# EAGLE board CMRI-Bus-Interface-L_array (EAGLE 7.7.0)
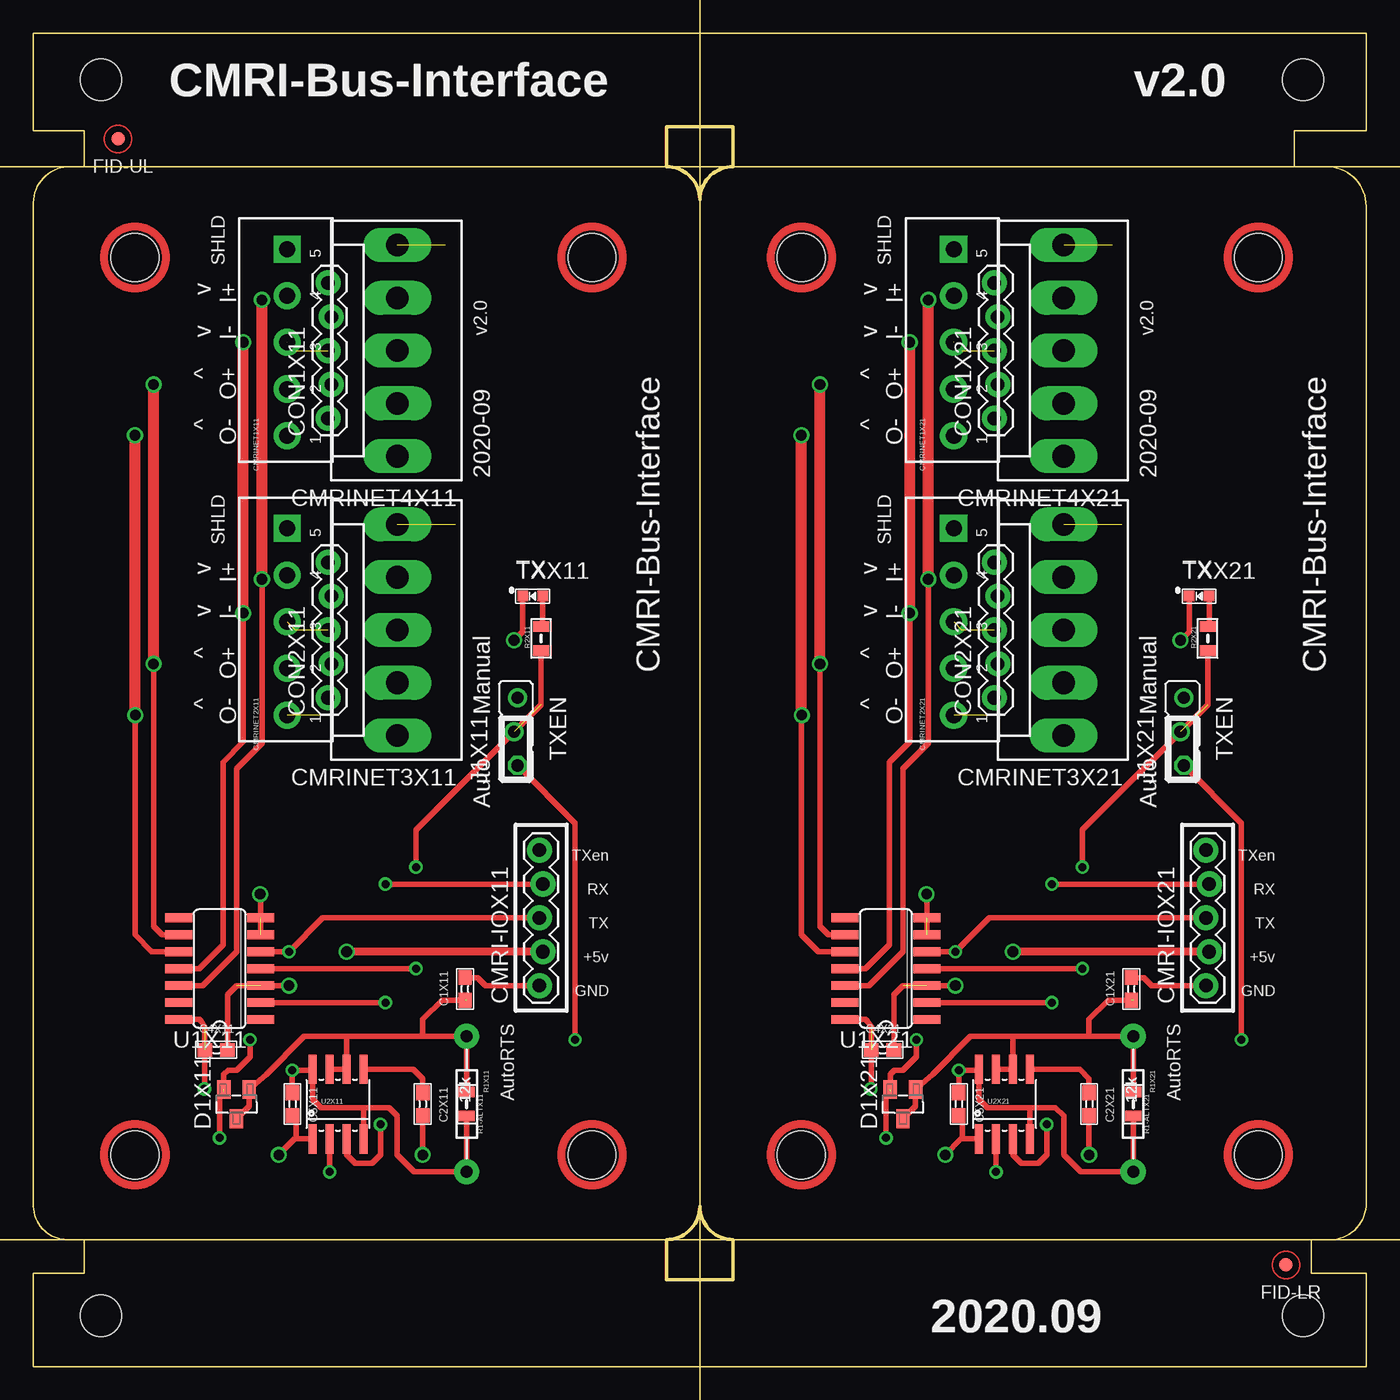
[diagram p0: board, top side]
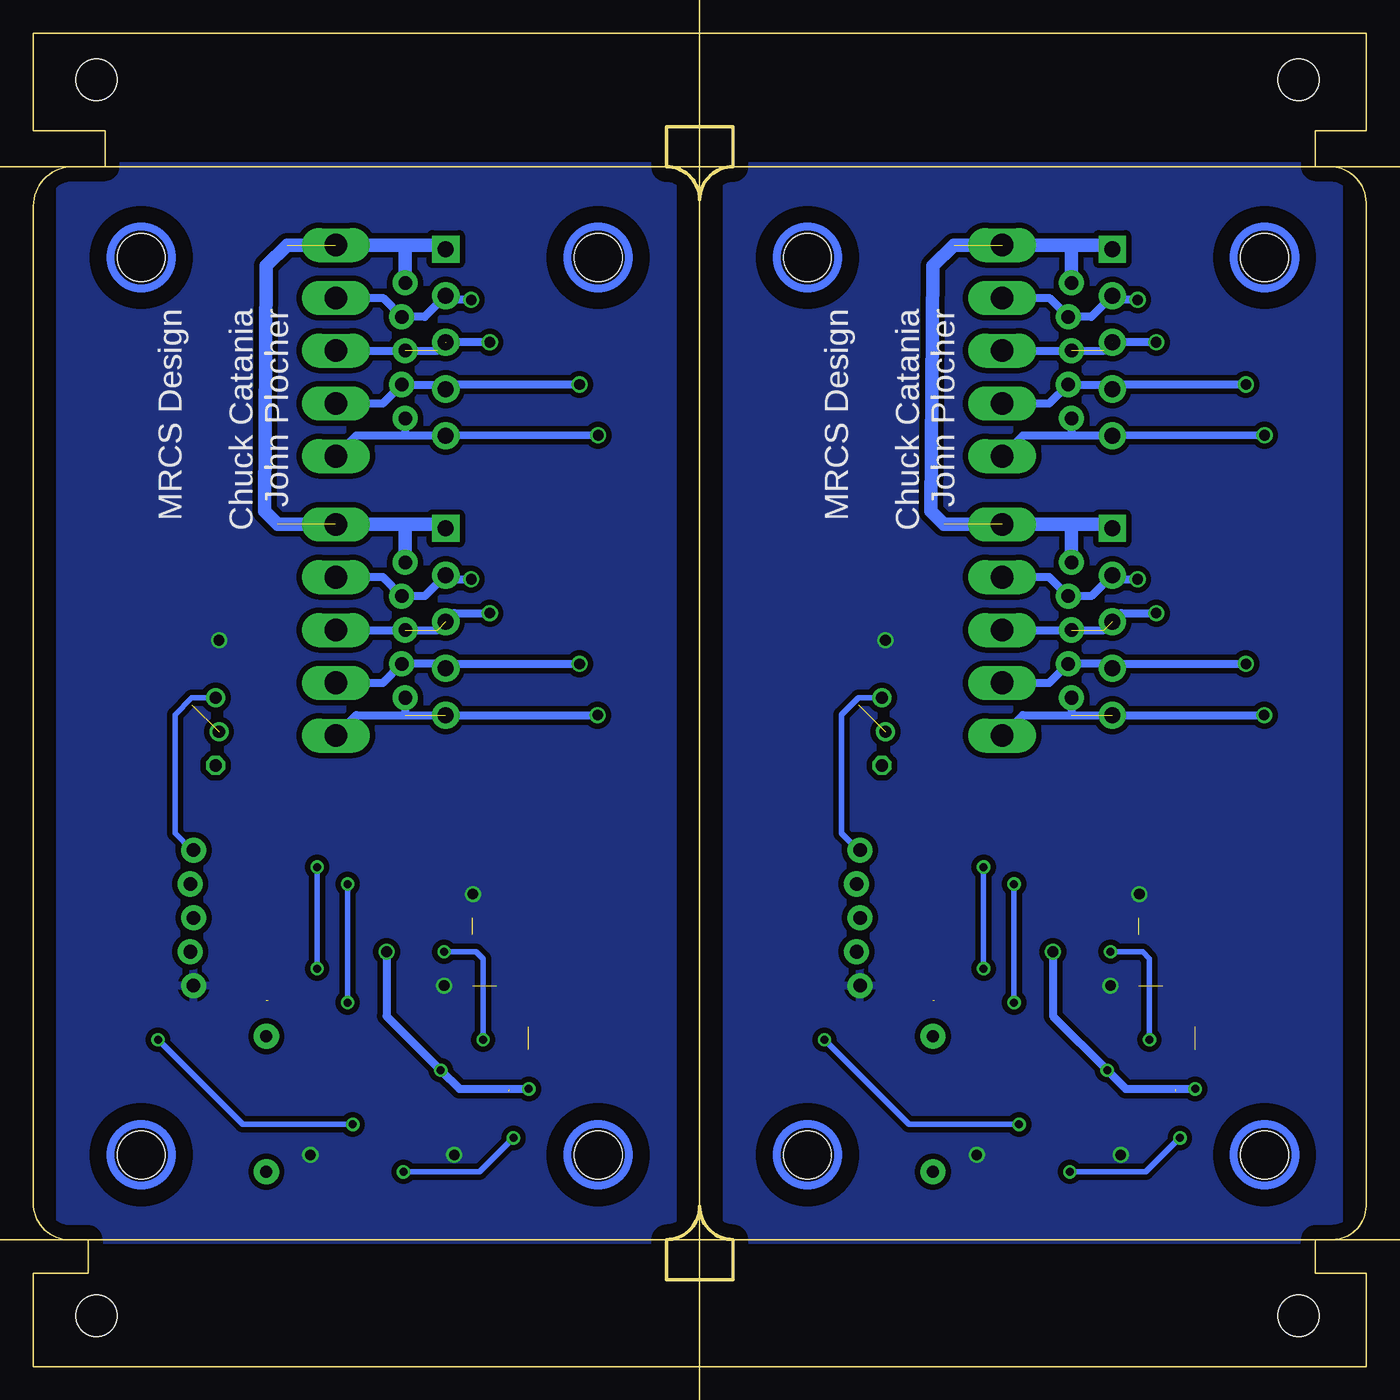
[diagram p1: board, bottom side, seen from below]

Size 100.01 x 100 mm. Coordinates in mm from the lower left corner, seen from the top.
Copper layers (1*16): Top 0.035mm / dielectric 1.5mm / Bottom 0.035mm
Design rules "default": minimum track width 10mil, minimum drill 0.6mm, track to track 8mil, track to pad 8mil, pad to pad 8mil, via to via 8mil, smd to smd 8mil, copper to edge 40mil, drill to drill 8mil, minimum pad ring 10mil, minimum via ring 8mil, stop-mask expansion 4mil, vias tented up to drill 0mil, thermal gap 10mil

## Footprints (pad centres in the part's own frame; a part is rotated, then mirrored left to right if it is on the bottom)
0603-CAP = smd 1.1 x 1: 1 -0.85,0; 2 0.85,0
1X05-CMRI-IO = drill 1.016 pad 1.88: 1 0,0.127; 2 2.54,-0.127; 3 5.08,0.127; 4 7.62,-0.127; 5 10.16,0.127
CMRINET-3.5MM = drill 1.2 pad 2.032: 1 -6.38,0; 2 -2.88,0; 3 0.62,0; 4 4.12,0 | drill 1.2 pad 2.032 square: 5 7.62,0
KK-156-5 = drill 1.7 pad 2.184 long: 1 -7.92,0; 2 -3.96,0; 3 0,0; 4 3.96,0; 5 7.92,0
1X05_LOCK = drill 1.016 pad 1.88: 1 0,0.127; 2 2.54,-0.127; 3 5.08,0.127; 4 7.62,-0.127; 5 10.16,0.127
SOT23 = smd 1.4 x 1: 1 1.1,-0.95; 2 1.1,0.95; 3 -1.1,0
FIDUCIAL_1MM = smd 1 x 1: 1 0,0
J3-254 = drill 0.914 octagon: 1 -2.54,-0.127 | drill 0.914: 2 0,0.127; 3 2.54,-0.127
MOUNTINGHOLE = hole 3.6: 0,0
0805-RES = smd 0.8 x 1.2: 1 -0.9,0; 2 0.9,0
AXIAL-0.4-RES = drill 0.9 pad 1.88: P$1 -5.08,0; P$2 5.08,0
0603-LED = smd 0.8 x 0.8: A 0.75,0; C -0.75,0
SO14 = smd 0.66 x 2.032: 1 -3.81,-3.073; 2 -2.54,-3.073; 3 -1.27,-3.073; 4 0,-3.073; 5 1.27,-3.073; 6 2.54,-3.073; 7 3.81,-3.073; 8 3.81,3.073; 9 2.54,3.073; 10 1.27,3.073; 11 0,3.073; 12 -1.27,3.073; 13 -2.54,3.073; 14 -3.81,3.073
BOARD-10X8X2-TEMPLATE = hole 3.1: 5.08,96.52; 95.25,96.52; 5.08,3.81; 95.25,3.81
SO08 = smd 0.61 x 2.21: 1 -1.905,-2.616; 2 -0.635,-2.616; 3 0.635,-2.616; 4 1.905,-2.616; 5 1.905,2.616; 6 0.635,2.616; 7 -0.635,2.616; 8 -1.905,2.616

## Placement (x,y rotation side)
C1X11  0.1uF  [0603-CAP]  32.39,28.32 90 top
C1X21  0.1uF  [0603-CAP]  82.39,28.32 90 top
C2X11  .01uF  [0603-CAP]  29.22,19.68 270 top
C2X21  .01uF  [0603-CAP]  79.22,19.68 270 top
C4X11  .01uF  [0603-CAP]  13.72,23.75 0 top
C4X21  .01uF  [0603-CAP]  63.72,23.75 0 top
C5X11  .01uF  [0603-CAP]  19.44,19.68 270 top
C5X21  .01uF  [0603-CAP]  69.44,19.68 270 top
CMRI-IOX11  0.100  [1X05-CMRI-IO]  38.11,28.57 90 top
CMRI-IOX21  0.100  [1X05-CMRI-IO]  88.11,28.57 90 top
CMRINET1X11  3.5mm  [CMRINET-3.5MM]  19.06,76.2 90 top
CMRINET1X21  3.5mm  [CMRINET-3.5MM]  69.06,76.2 90 top
CMRINET2X11  3.5mm  [CMRINET-3.5MM]  19.06,55.24 90 top
CMRINET2X21  3.5mm  [CMRINET-3.5MM]  69.06,55.24 90 top
CMRINET3X11  0.156  [KK-156-5]  27.31,55.24 90 top
CMRINET3X21  0.156  [KK-156-5]  77.31,55.24 90 top
CMRINET4X11  0.156  [KK-156-5]  27.31,76.2 90 top
CMRINET4X21  0.156  [KK-156-5]  77.31,76.2 90 top
CON1X11  0.100  [1X05_LOCK]  22.23,71.12 90 top
CON1X21  0.100  [1X05_LOCK]  72.23,71.12 90 top
CON2X11  0.100  [1X05_LOCK]  22.23,50.16 90 top
CON2X21  0.100  [1X05_LOCK]  72.23,50.16 90 top
D1X11  BAV199  [SOT23]  15.25,19.68 90 top
D1X21  BAV199  [SOT23]  65.25,19.68 90 top
FID-LR  FIDUCIAL  [FIDUCIAL_1MM]  93.99,7.62 0 top
FID-UL  FIDUCIAL  [FIDUCIAL_1MM]  6.36,92.08 0 top
J1X11  0.100  [J3-254]  36.2,47.62 90 top
J1X21  0.100  [J3-254]  86.2,47.62 90 top
M1X11  MOUNTINGHOLE  [MOUNTINGHOLE]  7.63,15.88 0 top
M1X21  MOUNTINGHOLE  [MOUNTINGHOLE]  57.63,15.88 0 top
M2X11  MOUNTINGHOLE  [MOUNTINGHOLE]  7.63,83.19 0 top
M2X21  MOUNTINGHOLE  [MOUNTINGHOLE]  57.63,83.19 0 top
M3X11  MOUNTINGHOLE  [MOUNTINGHOLE]  41.92,15.88 0 top
M3X21  MOUNTINGHOLE  [MOUNTINGHOLE]  91.92,15.88 0 top
M4X11  MOUNTINGHOLE  [MOUNTINGHOLE]  41.92,83.19 0 top
M4X21  MOUNTINGHOLE  [MOUNTINGHOLE]  91.92,83.19 0 top
R1-ALTX11  12k  [0805-RES]  32.52,19.68 270 top
R1-ALTX21  12k  [0805-RES]  82.52,19.68 270 top
R1X11  12k  [AXIAL-0.4-RES]  32.52,19.68 270 top
R1X21  12k  [AXIAL-0.4-RES]  82.52,19.68 270 top
R2X11  470  [0805-RES]  38.11,54.61 90 top
R2X21  470  [0805-RES]  88.11,54.61 90 top
TXX11  Y  [0603-LED]  37.47,57.78 0 top
TXX21  Y  [0603-LED]  87.47,57.78 0 top
U1X11  MAX3465CSD  [SO14]  13.98,29.84 90 top
U1X21  MAX3465CSD  [SO14]  63.98,29.84 90 top
U2X1  BOARD  [BOARD-10X8X2-TEMPLATE]  0.01,0 0 top
U2X11  NE555  [SO08]  22.87,19.68 0 top
U2X21  NE555  [SO08]  72.87,19.68 0 top

## Library data of the parts
C1X11 C1X21 C2X11 C2X21 C4X11 C4X21 C5X11 C5X21 CMRI-IOX11 CMRI-IOX21 CMRINET1X11 CMRINET1X21 CMRINET2X11 CMRINET2X21 CMRINET3X11 CMRINET3X21 CMRINET4X11 CMRINET4X21 CON1X11 CON1X21 CON2X11 CON2X21 D1X11 D1X21 FID-LR FID-UL J1X11 J1X21 M1X11 M1X21 M2X11 M2X21 M3X11 M3X21 M4X11 M4X21 R1-ALTX11 R1-ALTX21 R1X11 R1X21 R2X11 R2X21 TXX11 TXX21 U1X11 U1X21 U2X1 U2X11 U2X21 = SPCoast

## Nets
GNDX11: C1X11.2 C2X11.2 C4X11.2 C5X11.2 CMRI-IOX11.1 TXX11.C U1X11.3 U1X11.6 U1X11.7 U2X11.1
GNDX21: C1X21.2 C2X21.2 C4X21.2 C5X21.2 CMRI-IOX21.1 TXX21.C U1X21.3 U1X21.6 U1X21.7 U2X21.1
IN+X11: CMRINET1X11.4 CMRINET2X11.4 CMRINET3X11.4 CMRINET4X11.4 CON1X11.4 CON2X11.4 U1X11.12
IN+X21: CMRINET1X21.4 CMRINET2X21.4 CMRINET3X21.4 CMRINET4X21.4 CON1X21.4 CON2X21.4 U1X21.12
IN-X11: CMRINET1X11.3 CMRINET2X11.3 CMRINET3X11.3 CMRINET4X11.3 CON1X11.3 CON2X11.3 U1X11.11
IN-X21: CMRINET1X21.3 CMRINET2X21.3 CMRINET3X21.3 CMRINET4X21.3 CON1X21.3 CON2X21.3 U1X21.11
N$29X11: R2X11.2 TXX11.A
N$29X21: R2X21.2 TXX21.A
N$38X11: C2X11.1 U2X11.5
N$38X21: C2X21.1 U2X21.5
N$52X11: C1X11.1 D1X11.1 D1X11.3 R1-ALTX11.1 R1X11.P$1 U2X11.6 U2X11.7
N$52X21: C1X21.1 D1X21.1 D1X21.3 R1-ALTX21.1 R1X21.P$1 U2X21.6 U2X21.7
OUT+X11: CMRINET1X11.2 CMRINET2X11.2 CMRINET3X11.2 CMRINET4X11.2 CON1X11.2 CON2X11.2 U1X11.9
OUT+X21: CMRINET1X21.2 CMRINET2X21.2 CMRINET3X21.2 CMRINET4X21.2 CON1X21.2 CON2X21.2 U1X21.9
OUT-X11: CMRINET1X11.1 CMRINET2X11.1 CMRINET3X11.1 CMRINET4X11.1 CON1X11.1 CON2X11.1 U1X11.10
OUT-X21: CMRINET1X21.1 CMRINET2X21.1 CMRINET3X21.1 CMRINET4X21.1 CON1X21.1 CON2X21.1 U1X21.10
RXX11: CMRI-IOX11.4 U1X11.2
RXX21: CMRI-IOX21.4 U1X21.2
SHIELDX11: CMRINET1X11.5 CMRINET2X11.5 CMRINET3X11.5 CMRINET4X11.5 CON1X11.5 CON2X11.5
SHIELDX21: CMRINET1X21.5 CMRINET2X21.5 CMRINET3X21.5 CMRINET4X21.5 CON1X21.5 CON2X21.5
TXEN-AUTOX11: J1X11.1 U2X11.3
TXEN-AUTOX21: J1X21.1 U2X21.3
TXEN-MANUALX11: CMRI-IOX11.5 J1X11.3
TXEN-MANUALX21: CMRI-IOX21.5 J1X21.3
TXENX11: J1X11.2 R2X11.1 U1X11.4
TXENX21: J1X21.2 R2X21.1 U1X21.4
TXX11: CMRI-IOX11.3 D1X11.2 U1X11.5 U2X11.2
TXX21: CMRI-IOX21.3 D1X21.2 U1X21.5 U2X21.2
VCCX11: C4X11.1 C5X11.1 CMRI-IOX11.2 R1-ALTX11.2 R1X11.P$2 U1X11.14 U2X11.4 U2X11.8
VCCX21: C4X21.1 C5X21.1 CMRI-IOX21.2 R1-ALTX21.2 R1X21.P$2 U1X21.14 U2X21.4 U2X21.8

## Tracks (layer width: path | path; a pad name or v marks a point on that pad's centre or on a via)
GNDX11  (via drill 0.8 pad 1.21)  (2 unrouted)
  Top 0.406: U1X11.6 17.05,34.94 17.05,35.43 v17.03,35.43 | C2X11.2 v29.22,15.88 | C5X11.2 19.7,18.84 19.7,17.13 19.77,17.07 | U2X11.1 19.77,17.07 | 19.77,17.07 19.62,17.07 v18.42,15.88 | C1X11.2 33.32,29.17 33.92,28.57 CMRI-IOX11.1 | v19.18,28.57 15.25,28.57 14.57,27.9 C4X11.2 | TXX11.C 36.72,55.13 v36.08,54.48
  pour Bottom (isolate 0.406): 2.01,90.04 48.01,90.04 48.01,9.53 2.01,9.53
GNDX21  (via drill 0.8 pad 1.21)  (2 unrouted)
  Top 0.406: U1X21.6 67.05,34.94 67.05,35.43 v67.03,35.43 | C2X21.2 v79.22,15.88 | C5X21.2 69.7,18.84 69.7,17.13 69.77,17.07 | U2X21.1 69.77,17.07 | 69.77,17.07 69.62,17.07 v68.42,15.88 | C1X21.2 83.32,29.17 83.92,28.57 CMRI-IOX21.1 | v69.18,28.57 65.25,28.57 64.57,27.9 C4X21.2 | TXX21.C 86.72,55.13 v86.08,54.48
  pour Bottom (isolate 0.406): 52.01,90.04 98.01,90.04 98.01,9.53 52.01,9.53
IN+X11  (via drill 0.8 pad 1.21)
  Top 0.406: U1X11.12 12.71,28.57 15.25,31.11 15.25,44.83 17.15,46.74 v17.15,59.05
  Top 0.813: v17.15,59.05 v17.15,80.01
  Bottom 0.61: v17.15,80.01 18.75,80.01 CMRINET1X11.4 20.64,78.74 CON1X11.4 23.78,80.16 CMRINET4X11.4 | v17.15,59.05 18.75,59.05 CMRINET2X11.4 20.64,57.78 CON2X11.4 23.78,59.2 CMRINET3X11.4
IN+X21  (via drill 0.8 pad 1.21)
  Top 0.406: U1X21.12 62.71,28.57 65.25,31.11 65.25,44.83 67.15,46.74 v67.15,59.05
  Top 0.813: v67.15,59.05 v67.15,80.01
  Bottom 0.61: v67.15,80.01 68.75,80.01 CMRINET1X21.4 70.64,78.74 CON1X21.4 73.78,80.16 CMRINET4X21.4 | v67.15,59.05 68.75,59.05 CMRINET2X21.4 70.64,57.78 CON2X21.4 73.78,59.2 CMRINET3X21.4
IN-X11  (via drill 0.8 pad 1.21)  (4 unrouted)
  Top 0.406: U1X11.11 12.45,29.84 14.23,31.62 14.23,45.34 15.76,46.86 v15.76,56.52
  Top 0.813: v15.76,56.52 v15.76,76.83
  Bottom 0.61: v15.76,76.83 19.04,76.83 19.68,76.2 CMRINET4X11.3 | v15.76,56.52 18.41,56.52 19.68,55.24 CMRINET3X11.3
IN-X21  (via drill 0.8 pad 1.21)  (4 unrouted)
  Top 0.406: U1X21.11 62.45,29.84 64.23,31.62 64.23,45.34 65.76,46.86 v65.76,56.52
  Top 0.813: v65.76,56.52 v65.76,76.83
  Bottom 0.61: v65.76,76.83 69.04,76.83 69.68,76.2 CMRINET4X21.3 | v65.76,56.52 68.41,56.52 69.68,55.24 CMRINET3X21.3
N$29X11
  Top 0.406: TXX11.A 38.22,55.62 R2X11.2
N$29X21
  Top 0.406: TXX21.A 88.22,55.62 R2X21.2
N$38X11
  Top 0.406: U2X11.5 28.51,22.3 29.22,21.59 C2X11.1
N$38X21
  Top 0.406: U2X21.5 78.51,22.3 79.22,21.59 C2X21.1
N$52X11  (1 unrouted)
  Top 0.406: U2X11.7 U2X11.6 23.5,24.77 | 23.5,24.77 29.22,24.77 | 29.22,24.77 R1X11.P$1 R1-ALTX11.1 | 23.5,24.77 20.33,24.77 17.47,21.91 D1X11.1 16.2,19.54 D1X11.3 | 32.52,27.47 30.65,27.47 29.22,26.04 29.22,24.77
N$52X21  (1 unrouted)
  Top 0.406: U2X21.7 U2X21.6 73.5,24.77 | 73.5,24.77 79.22,24.77 | 79.22,24.77 R1X21.P$1 R1-ALTX21.1 | 73.5,24.77 70.33,24.77 67.47,21.91 D1X21.1 66.2,19.54 D1X21.3 | 82.52,27.47 80.65,27.47 79.22,26.04 79.22,24.77
OUT+X11  (via drill 0.8 pad 1.21)
  Top 0.406: U1X11.9 9.66,32.38 9.02,33.02 v9.02,52.7
  Top 0.813: v9.02,52.7 v9.02,73.66
  Bottom 0.406: CMRINET2X11.2 18.72,52.7
  Bottom 0.61: v9.02,73.66 18.72,73.66 CMRINET1X11.2 19.4,73.66 CON1X11.2 23.78,72.24 CMRINET4X11.2 | 18.72,52.7 v9.02,52.7 | CMRINET2X11.2 19.4,52.7 CON2X11.2 23.78,51.28 CMRINET3X11.2
OUT+X21  (via drill 0.8 pad 1.21)
  Top 0.406: U1X21.9 59.66,32.38 59.02,33.02 v59.02,52.7
  Top 0.813: v59.02,52.7 v59.02,73.66
  Bottom 0.406: CMRINET2X21.2 68.72,52.7
  Bottom 0.61: v59.02,73.66 68.72,73.66 CMRINET1X21.2 69.4,73.66 CON1X21.2 73.78,72.24 CMRINET4X21.2 | 68.72,52.7 v59.02,52.7 | CMRINET2X21.2 69.4,52.7 CON2X21.2 73.78,51.28 CMRINET3X21.2
OUT-X11  (via drill 0.8 pad 1.21)  (1 unrouted)
  Top 0.406: U1X11.10 8.9,31.11 7.63,32.38 7.63,48.9 v7.66,48.87
  Top 0.813: 7.63,48.9 v7.63,69.85
  Bottom 0.61: v7.63,69.85 CMRINET1X11.1 22.11,69.82 | 22.11,48.87 25.77,48.87 CMRINET3X11.1 | 22.11,48.87 v7.66,48.87 | 22.11,69.82 25.77,69.82 CMRINET4X11.1 | CON1X11.1 22.11,69.82 | CON2X11.1 22.11,48.87
OUT-X21  (via drill 0.8 pad 1.21)  (1 unrouted)
  Top 0.406: U1X21.10 58.9,31.11 57.63,32.38 57.63,48.9 v57.66,48.87
  Top 0.813: 57.63,48.9 v57.63,69.85
  Bottom 0.61: v57.63,69.85 CMRINET1X21.1 72.11,69.82 | 72.11,48.87 75.77,48.87 CMRINET3X21.1 | 72.11,48.87 v57.66,48.87 | 72.11,69.82 75.77,69.82 CMRINET4X21.1 | CON1X21.1 72.11,69.82 | CON2X21.1 72.11,48.87
RXX11  (via drill 0.6 pad 1.01)
  Top 0.406: U1X11.2 v26.42,27.3 | v26.42,36.2 CMRI-IOX11.4
  Bottom 0.406: v26.42,27.3 v26.42,36.2
RXX21  (via drill 0.6 pad 1.01)
  Top 0.406: U1X21.2 v76.42,27.3 | v76.42,36.2 CMRI-IOX21.4
  Bottom 0.406: v76.42,27.3 v76.42,36.2
SHIELDX11  (2 unrouted)
  Bottom 1.016: CMRINET1X11.5 19.36,84.12 22.11,84.12 | 22.11,84.12 30.95,84.12 32.52,82.55 32.65,64.14 31.68,63.16 22.11,63.16 | CON1X11.5 22.11,84.12 | CMRINET2X11.5 19.06,63.16 22.11,63.16 | CON2X11.5 22.11,63.16
SHIELDX21  (2 unrouted)
  Bottom 1.016: CMRINET1X21.5 69.36,84.12 72.11,84.12 | 72.11,84.12 80.95,84.12 82.52,82.55 82.65,64.14 81.68,63.16 72.11,63.16 | CON1X21.5 72.11,84.12 | CMRINET2X21.5 69.06,63.16 72.11,63.16 | CON2X21.5 72.11,63.16
TXEN-AUTOX11  (via drill 0.6 pad 1.01)
  Top 0.406: v26.04,18.16 26.04,15.88 25.41,15.24 24.14,15.24 23.5,15.88 U2X11.3 | v40.65,24.51 40.65,40.77 J1X11.1
  Bottom 0.406: v40.65,24.51 34.3,18.16 v26.04,18.16
TXEN-AUTOX21  (via drill 0.6 pad 1.01)
  Top 0.406: v76.04,18.16 76.04,15.88 75.41,15.24 74.14,15.24 73.5,15.88 U2X21.3 | v90.65,24.51 90.65,40.77 J1X21.1
  Bottom 0.406: v90.65,24.51 84.3,18.16 v76.04,18.16
TXEN-MANUALX11
  Bottom 0.406: J1X11.3 38.11,50.16 39.38,48.9 39.38,40.01 38.11,38.73 CMRI-IOX11.5
TXEN-MANUALX21
  Bottom 0.406: J1X21.3 88.11,50.16 89.38,48.9 89.38,40.01 88.11,38.73 CMRI-IOX21.5
TXENX11  (via drill 0.6 pad 1.01)  (1 unrouted)
  Top 0.406: U1X11.4 v28.71,29.84 | R2X11.1 38.11,49.66 28.71,40.26 v28.71,37.47
  Bottom 0.406: v28.71,29.84 v28.71,37.47
TXENX21  (via drill 0.6 pad 1.01)  (1 unrouted)
  Top 0.406: U1X21.4 v78.71,29.84 | R2X21.1 88.11,49.66 78.71,40.26 v78.71,37.47
  Bottom 0.406: v78.71,29.84 v78.71,37.47
TXX11  (via drill 0.6 pad 1.01)  (1 unrouted)
  Top 0.406: U1X11.5 v19.18,31.11 21.72,33.66 CMRI-IOX11.3 | v13.98,17.14 13.98,20.32 14.3,20.64 14.3,21.91 14.61,22.23 15.25,22.23 16.26,23.24 v16.26,24.51 | v22.23,14.61 U2X11.2
  Bottom 0.406: v13.98,17.14 16.52,14.61 v22.23,14.61 | v19.18,31.11 16.77,31.11 16.26,30.61 v16.26,24.51
TXX21  (via drill 0.6 pad 1.01)  (1 unrouted)
  Top 0.406: U1X21.5 v69.18,31.11 71.72,33.66 CMRI-IOX21.3 | v63.98,17.14 63.98,20.32 64.3,20.64 64.3,21.91 64.61,22.23 65.25,22.23 66.26,23.24 v66.26,24.51 | v72.23,14.61 U2X21.2
  Bottom 0.406: v63.98,17.14 66.52,14.61 v72.23,14.61 | v69.18,31.11 66.77,31.11 66.26,30.61 v66.26,24.51
VCCX11  (via drill 0.6 pad 1.01, 0.8 pad 1.21)  (1 unrouted)
  Top 0.254: 24.77,17.78 U2X11.4
  Top 0.406: C5X11.1 v19.44,22.23 20.89,22.23 U2X11.8 20.96,20.07 21.6,19.43 24.77,19.43 | 24.77,19.43 U2X11.4 | 24.77,19.43 26.68,19.43 27.31,18.8 27.31,15.88 28.58,14.61 R1X11.P$2 R1-ALTX11.2 | U1X11.14 12.45,26.04 12.58,25.91 12.87,25.49 12.87,20.87 v12.83,20.83
  Top 0.61: CMRI-IOX11.2 v23.5,31.11
  Bottom 0.61: v12.83,20.83 18.04,20.83 v19.44,22.23 23.5,26.29 v23.5,31.11
VCCX21  (via drill 0.6 pad 1.01, 0.8 pad 1.21)  (1 unrouted)
  Top 0.254: 74.77,17.78 U2X21.4
  Top 0.406: C5X21.1 v69.44,22.23 70.89,22.23 U2X21.8 70.96,20.07 71.6,19.43 74.77,19.43 | 74.77,19.43 U2X21.4 | 74.77,19.43 76.68,19.43 77.31,18.8 77.31,15.88 78.58,14.61 R1X21.P$2 R1-ALTX21.2 | U1X21.14 62.45,26.04 62.58,25.91 62.87,25.49 62.87,20.87 v62.83,20.83
  Top 0.61: CMRI-IOX21.2 v73.5,31.11
  Bottom 0.61: v62.83,20.83 68.04,20.83 v69.44,22.23 73.5,26.29 v73.5,31.11

## Text on the board
tPlace: CMRI-Bus-Interface | v2.0 | v2.0 | v2.0 | 2020-09 | 2020-09 | TX | TX | CMRI-Bus-Interface | CMRI-Bus-Interface | Manual | Manual | TXEN | TXEN | Auto | Auto | AutoRTS | AutoRTS | 2020.09
bPlace: MRCS Design / / Chuck Catania / John Plocher | MRCS Design / / Chuck Catania / John Plocher
_tPlace: C1 | C1 | R1 | R1
_tNames: CON1 | CON1 | CMRINET1 | CMRINET1 | CMRINET4 | CMRINET4 | CON2 | CON2 | TX | TX | CMRINET2 | CMRINET2 | CMRINET3 | R2 | CMRINET3 | R2 | J1 | J1 | U1 | U1 | CMRI-IO | CMRI-IO | C4 | C4 | R1-ALT | R1-ALT | D1 | D1 | U2 | C5 | C2 | U2 | C5 | C2